# EAGLE board ww4-mm (EAGLE 7.2.0), part 1 of 2
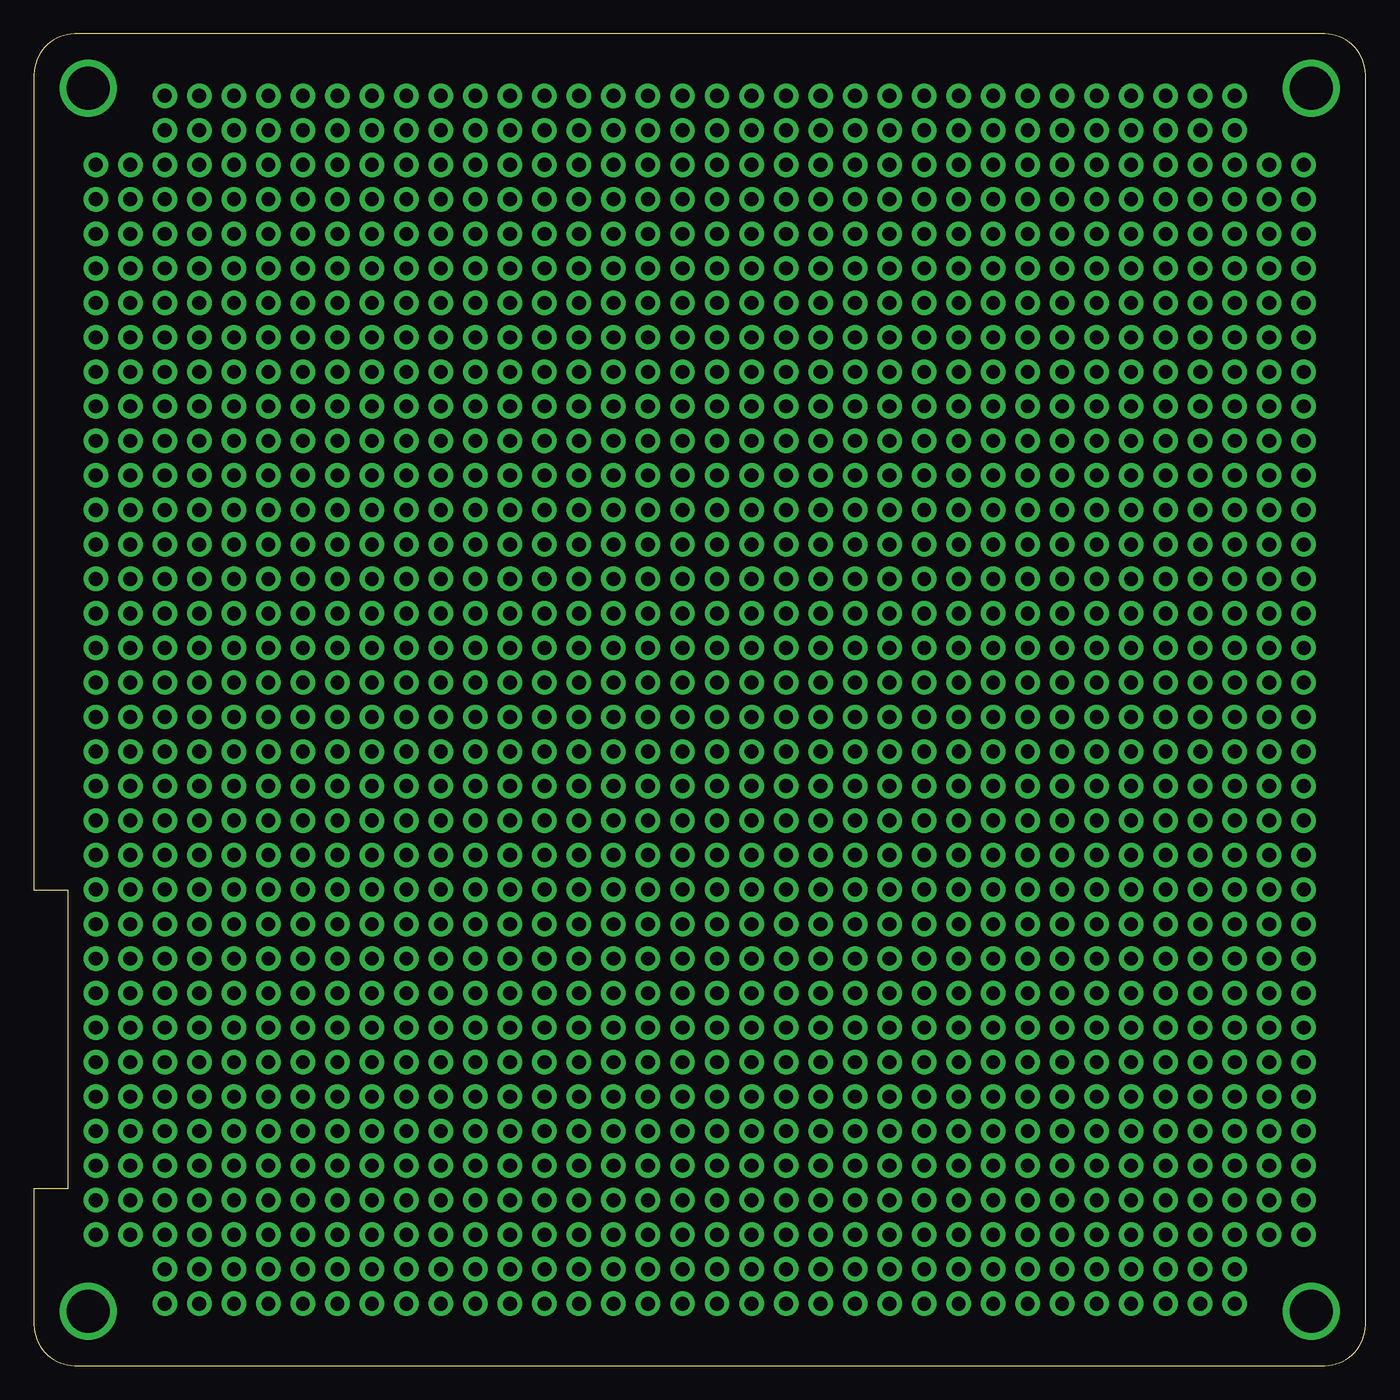
[diagram p0: board, top side]

Size 98 x 98 mm. Coordinates in mm from the lower left corner, seen from the top.
Outline: 0,13 0,3 arc90 3,0 95,0 arc90 98,3 98,95 arc90 95,98 3,98 arc90 0,95 0,35 2.5,35 2.5,13 0,13
Copper layers (1*16): Top 0.035mm / dielectric 1.5mm / Bottom 0.035mm
Design rules "default": minimum track width 10mil, minimum drill 24mil, track to track 8mil, track to pad 8mil, pad to pad 8mil, via to via 8mil, smd to smd 8mil, copper to edge 20mil, drill to drill 8mil, minimum pad ring 10mil, minimum via ring 8mil, stop-mask expansion 4mil, vias tented up to drill 0mil, thermal gap 10mil

## Placement (x,y rotation side)

## Tracks (layer width: path | path; a pad name or v marks a point on that pad's centre or on a via)
MOUNT0  (via drill 3.17 pad 3.17)
  other vias: 4,4
MOUNT1  (via drill 3.17 pad 3.17)
  other vias: 4,94
MOUNT6  (via drill 3.17 pad 3.17)
  other vias: 94,4
MOUNT7  (via drill 3.17 pad 3.17)
  other vias: 94,94
WW2  (via drill 1.02 pad 1.8)
  other vias: 4.55,9.63
WW3  (via drill 1.02 pad 1.8)
  other vias: 4.55,12.17
WW4  (via drill 1.02 pad 1.8)
  other vias: 4.55,14.71
WW5  (via drill 1.02 pad 1.8)
  other vias: 4.55,17.25
WW6  (via drill 1.02 pad 1.8)
  other vias: 4.55,19.79
WW7  (via drill 1.02 pad 1.8)
  other vias: 4.55,22.33
WW8  (via drill 1.02 pad 1.8)
  other vias: 4.55,24.87
WW9  (via drill 1.02 pad 1.8)
  other vias: 4.55,27.41
WW10  (via drill 1.02 pad 1.8)
  other vias: 4.55,29.95
WW11  (via drill 1.02 pad 1.8)
  other vias: 4.55,32.49
WW12  (via drill 1.02 pad 1.8)
  other vias: 4.55,35.03
WW13  (via drill 1.02 pad 1.8)
  other vias: 4.55,37.57
WW14  (via drill 1.02 pad 1.8)
  other vias: 4.55,40.11
WW15  (via drill 1.02 pad 1.8)
  other vias: 4.55,42.65
WW16  (via drill 1.02 pad 1.8)
  other vias: 4.55,45.19
WW17  (via drill 1.02 pad 1.8)
  other vias: 4.55,47.73
WW18  (via drill 1.02 pad 1.8)
  other vias: 4.55,50.27
WW19  (via drill 1.02 pad 1.8)
  other vias: 4.55,52.81
WW20  (via drill 1.02 pad 1.8)
  other vias: 4.55,55.35
WW21  (via drill 1.02 pad 1.8)
  other vias: 4.55,57.89
WW22  (via drill 1.02 pad 1.8)
  other vias: 4.55,60.43
WW23  (via drill 1.02 pad 1.8)
  other vias: 4.55,62.97
WW24  (via drill 1.02 pad 1.8)
  other vias: 4.55,65.51
WW25  (via drill 1.02 pad 1.8)
  other vias: 4.55,68.05
WW26  (via drill 1.02 pad 1.8)
  other vias: 4.55,70.59
WW27  (via drill 1.02 pad 1.8)
  other vias: 4.55,73.13
WW28  (via drill 1.02 pad 1.8)
  other vias: 4.55,75.67
WW29  (via drill 1.02 pad 1.8)
  other vias: 4.55,78.21
WW30  (via drill 1.02 pad 1.8)
  other vias: 4.55,80.75
WW31  (via drill 1.02 pad 1.8)
  other vias: 4.55,83.29
WW32  (via drill 1.02 pad 1.8)
  other vias: 4.55,85.83
WW33  (via drill 1.02 pad 1.8)
  other vias: 4.55,88.37
WW38  (via drill 1.02 pad 1.8)
  other vias: 7.09,9.63
WW39  (via drill 1.02 pad 1.8)
  other vias: 7.09,12.17
WW40  (via drill 1.02 pad 1.8)
  other vias: 7.09,14.71
WW41  (via drill 1.02 pad 1.8)
  other vias: 7.09,17.25
WW42  (via drill 1.02 pad 1.8)
  other vias: 7.09,19.79
WW43  (via drill 1.02 pad 1.8)
  other vias: 7.09,22.33
WW44  (via drill 1.02 pad 1.8)
  other vias: 7.09,24.87
WW45  (via drill 1.02 pad 1.8)
  other vias: 7.09,27.41
WW46  (via drill 1.02 pad 1.8)
  other vias: 7.09,29.95
WW47  (via drill 1.02 pad 1.8)
  other vias: 7.09,32.49
WW48  (via drill 1.02 pad 1.8)
  other vias: 7.09,35.03
WW49  (via drill 1.02 pad 1.8)
  other vias: 7.09,37.57
WW50  (via drill 1.02 pad 1.8)
  other vias: 7.09,40.11
WW51  (via drill 1.02 pad 1.8)
  other vias: 7.09,42.65
WW52  (via drill 1.02 pad 1.8)
  other vias: 7.09,45.19
WW53  (via drill 1.02 pad 1.8)
  other vias: 7.09,47.73
WW54  (via drill 1.02 pad 1.8)
  other vias: 7.09,50.27
WW55  (via drill 1.02 pad 1.8)
  other vias: 7.09,52.81
WW56  (via drill 1.02 pad 1.8)
  other vias: 7.09,55.35
WW57  (via drill 1.02 pad 1.8)
  other vias: 7.09,57.89
WW58  (via drill 1.02 pad 1.8)
  other vias: 7.09,60.43
WW59  (via drill 1.02 pad 1.8)
  other vias: 7.09,62.97
WW60  (via drill 1.02 pad 1.8)
  other vias: 7.09,65.51
WW61  (via drill 1.02 pad 1.8)
  other vias: 7.09,68.05
WW62  (via drill 1.02 pad 1.8)
  other vias: 7.09,70.59
WW63  (via drill 1.02 pad 1.8)
  other vias: 7.09,73.13
WW64  (via drill 1.02 pad 1.8)
  other vias: 7.09,75.67
WW65  (via drill 1.02 pad 1.8)
  other vias: 7.09,78.21
WW66  (via drill 1.02 pad 1.8)
  other vias: 7.09,80.75
WW67  (via drill 1.02 pad 1.8)
  other vias: 7.09,83.29
WW68  (via drill 1.02 pad 1.8)
  other vias: 7.09,85.83
WW69  (via drill 1.02 pad 1.8)
  other vias: 7.09,88.37
WW72  (via drill 1.02 pad 1.8)
  other vias: 9.63,4.55
WW73  (via drill 1.02 pad 1.8)
  other vias: 9.63,7.09
WW74  (via drill 1.02 pad 1.8)
  other vias: 9.63,9.63
WW75  (via drill 1.02 pad 1.8)
  other vias: 9.63,12.17
WW76  (via drill 1.02 pad 1.8)
  other vias: 9.63,14.71
WW77  (via drill 1.02 pad 1.8)
  other vias: 9.63,17.25
WW78  (via drill 1.02 pad 1.8)
  other vias: 9.63,19.79
WW79  (via drill 1.02 pad 1.8)
  other vias: 9.63,22.33
WW80  (via drill 1.02 pad 1.8)
  other vias: 9.63,24.87
WW81  (via drill 1.02 pad 1.8)
  other vias: 9.63,27.41
WW82  (via drill 1.02 pad 1.8)
  other vias: 9.63,29.95
WW83  (via drill 1.02 pad 1.8)
  other vias: 9.63,32.49
WW84  (via drill 1.02 pad 1.8)
  other vias: 9.63,35.03
WW85  (via drill 1.02 pad 1.8)
  other vias: 9.63,37.57
WW86  (via drill 1.02 pad 1.8)
  other vias: 9.63,40.11
WW87  (via drill 1.02 pad 1.8)
  other vias: 9.63,42.65
WW88  (via drill 1.02 pad 1.8)
  other vias: 9.63,45.19
WW89  (via drill 1.02 pad 1.8)
  other vias: 9.63,47.73
WW90  (via drill 1.02 pad 1.8)
  other vias: 9.63,50.27
WW91  (via drill 1.02 pad 1.8)
  other vias: 9.63,52.81
WW92  (via drill 1.02 pad 1.8)
  other vias: 9.63,55.35
WW93  (via drill 1.02 pad 1.8)
  other vias: 9.63,57.89
WW94  (via drill 1.02 pad 1.8)
  other vias: 9.63,60.43
WW95  (via drill 1.02 pad 1.8)
  other vias: 9.63,62.97
WW96  (via drill 1.02 pad 1.8)
  other vias: 9.63,65.51
WW97  (via drill 1.02 pad 1.8)
  other vias: 9.63,68.05
WW98  (via drill 1.02 pad 1.8)
  other vias: 9.63,70.59
WW99  (via drill 1.02 pad 1.8)
  other vias: 9.63,73.13
WW100  (via drill 1.02 pad 1.8)
  other vias: 9.63,75.67
WW101  (via drill 1.02 pad 1.8)
  other vias: 9.63,78.21
WW102  (via drill 1.02 pad 1.8)
  other vias: 9.63,80.75
WW103  (via drill 1.02 pad 1.8)
  other vias: 9.63,83.29
WW104  (via drill 1.02 pad 1.8)
  other vias: 9.63,85.83
WW105  (via drill 1.02 pad 1.8)
  other vias: 9.63,88.37
WW106  (via drill 1.02 pad 1.8)
  other vias: 9.63,90.91
WW107  (via drill 1.02 pad 1.8)
  other vias: 9.63,93.45
WW108  (via drill 1.02 pad 1.8)
  other vias: 12.17,4.55
WW109  (via drill 1.02 pad 1.8)
  other vias: 12.17,7.09
WW110  (via drill 1.02 pad 1.8)
  other vias: 12.17,9.63
WW111  (via drill 1.02 pad 1.8)
  other vias: 12.17,12.17
WW112  (via drill 1.02 pad 1.8)
  other vias: 12.17,14.71
WW113  (via drill 1.02 pad 1.8)
  other vias: 12.17,17.25
WW114  (via drill 1.02 pad 1.8)
  other vias: 12.17,19.79
WW115  (via drill 1.02 pad 1.8)
  other vias: 12.17,22.33
WW116  (via drill 1.02 pad 1.8)
  other vias: 12.17,24.87
WW117  (via drill 1.02 pad 1.8)
  other vias: 12.17,27.41
WW118  (via drill 1.02 pad 1.8)
  other vias: 12.17,29.95
WW119  (via drill 1.02 pad 1.8)
  other vias: 12.17,32.49
WW120  (via drill 1.02 pad 1.8)
  other vias: 12.17,35.03
WW121  (via drill 1.02 pad 1.8)
  other vias: 12.17,37.57
WW122  (via drill 1.02 pad 1.8)
  other vias: 12.17,40.11
WW123  (via drill 1.02 pad 1.8)
  other vias: 12.17,42.65
WW124  (via drill 1.02 pad 1.8)
  other vias: 12.17,45.19
WW125  (via drill 1.02 pad 1.8)
  other vias: 12.17,47.73
WW126  (via drill 1.02 pad 1.8)
  other vias: 12.17,50.27
WW127  (via drill 1.02 pad 1.8)
  other vias: 12.17,52.81
WW128  (via drill 1.02 pad 1.8)
  other vias: 12.17,55.35
WW129  (via drill 1.02 pad 1.8)
  other vias: 12.17,57.89
WW130  (via drill 1.02 pad 1.8)
  other vias: 12.17,60.43
WW131  (via drill 1.02 pad 1.8)
  other vias: 12.17,62.97
WW132  (via drill 1.02 pad 1.8)
  other vias: 12.17,65.51
WW133  (via drill 1.02 pad 1.8)
  other vias: 12.17,68.05
WW134  (via drill 1.02 pad 1.8)
  other vias: 12.17,70.59
WW135  (via drill 1.02 pad 1.8)
  other vias: 12.17,73.13
WW136  (via drill 1.02 pad 1.8)
  other vias: 12.17,75.67
WW137  (via drill 1.02 pad 1.8)
  other vias: 12.17,78.21
WW138  (via drill 1.02 pad 1.8)
  other vias: 12.17,80.75
WW139  (via drill 1.02 pad 1.8)
  other vias: 12.17,83.29
WW140  (via drill 1.02 pad 1.8)
  other vias: 12.17,85.83
WW141  (via drill 1.02 pad 1.8)
  other vias: 12.17,88.37
WW142  (via drill 1.02 pad 1.8)
  other vias: 12.17,90.91
WW143  (via drill 1.02 pad 1.8)
  other vias: 12.17,93.45
WW144  (via drill 1.02 pad 1.8)
  other vias: 14.71,4.55
WW145  (via drill 1.02 pad 1.8)
  other vias: 14.71,7.09
WW146  (via drill 1.02 pad 1.8)
  other vias: 14.71,9.63
WW147  (via drill 1.02 pad 1.8)
  other vias: 14.71,12.17
WW148  (via drill 1.02 pad 1.8)
  other vias: 14.71,14.71
WW149  (via drill 1.02 pad 1.8)
  other vias: 14.71,17.25
WW150  (via drill 1.02 pad 1.8)
  other vias: 14.71,19.79
WW151  (via drill 1.02 pad 1.8)
  other vias: 14.71,22.33
WW152  (via drill 1.02 pad 1.8)
  other vias: 14.71,24.87
WW153  (via drill 1.02 pad 1.8)
  other vias: 14.71,27.41
WW154  (via drill 1.02 pad 1.8)
  other vias: 14.71,29.95
WW155  (via drill 1.02 pad 1.8)
  other vias: 14.71,32.49
WW156  (via drill 1.02 pad 1.8)
  other vias: 14.71,35.03
WW157  (via drill 1.02 pad 1.8)
  other vias: 14.71,37.57
WW158  (via drill 1.02 pad 1.8)
  other vias: 14.71,40.11
WW159  (via drill 1.02 pad 1.8)
  other vias: 14.71,42.65
WW160  (via drill 1.02 pad 1.8)
  other vias: 14.71,45.19
WW161  (via drill 1.02 pad 1.8)
  other vias: 14.71,47.73
WW162  (via drill 1.02 pad 1.8)
  other vias: 14.71,50.27
WW163  (via drill 1.02 pad 1.8)
  other vias: 14.71,52.81
WW164  (via drill 1.02 pad 1.8)
  other vias: 14.71,55.35
WW165  (via drill 1.02 pad 1.8)
  other vias: 14.71,57.89
WW166  (via drill 1.02 pad 1.8)
  other vias: 14.71,60.43
WW167  (via drill 1.02 pad 1.8)
  other vias: 14.71,62.97
WW168  (via drill 1.02 pad 1.8)
  other vias: 14.71,65.51
WW169  (via drill 1.02 pad 1.8)
  other vias: 14.71,68.05
WW170  (via drill 1.02 pad 1.8)
  other vias: 14.71,70.59
WW171  (via drill 1.02 pad 1.8)
  other vias: 14.71,73.13
WW172  (via drill 1.02 pad 1.8)
  other vias: 14.71,75.67
WW173  (via drill 1.02 pad 1.8)
  other vias: 14.71,78.21
WW174  (via drill 1.02 pad 1.8)
  other vias: 14.71,80.75
WW175  (via drill 1.02 pad 1.8)
  other vias: 14.71,83.29
WW176  (via drill 1.02 pad 1.8)
  other vias: 14.71,85.83
WW177  (via drill 1.02 pad 1.8)
  other vias: 14.71,88.37
WW178  (via drill 1.02 pad 1.8)
  other vias: 14.71,90.91
WW179  (via drill 1.02 pad 1.8)
  other vias: 14.71,93.45
WW180  (via drill 1.02 pad 1.8)
  other vias: 17.25,4.55
WW181  (via drill 1.02 pad 1.8)
  other vias: 17.25,7.09
WW182  (via drill 1.02 pad 1.8)
  other vias: 17.25,9.63
WW183  (via drill 1.02 pad 1.8)
  other vias: 17.25,12.17
WW184  (via drill 1.02 pad 1.8)
  other vias: 17.25,14.71
WW185  (via drill 1.02 pad 1.8)
  other vias: 17.25,17.25
WW186  (via drill 1.02 pad 1.8)
  other vias: 17.25,19.79
WW187  (via drill 1.02 pad 1.8)
  other vias: 17.25,22.33
WW188  (via drill 1.02 pad 1.8)
  other vias: 17.25,24.87
WW189  (via drill 1.02 pad 1.8)
  other vias: 17.25,27.41
WW190  (via drill 1.02 pad 1.8)
  other vias: 17.25,29.95
WW191  (via drill 1.02 pad 1.8)
  other vias: 17.25,32.49
WW192  (via drill 1.02 pad 1.8)
  other vias: 17.25,35.03
WW193  (via drill 1.02 pad 1.8)
  other vias: 17.25,37.57
WW194  (via drill 1.02 pad 1.8)
  other vias: 17.25,40.11
WW195  (via drill 1.02 pad 1.8)
  other vias: 17.25,42.65
WW196  (via drill 1.02 pad 1.8)
  other vias: 17.25,45.19
WW197  (via drill 1.02 pad 1.8)
  other vias: 17.25,47.73
WW198  (via drill 1.02 pad 1.8)
  other vias: 17.25,50.27
WW199  (via drill 1.02 pad 1.8)
  other vias: 17.25,52.81
WW200  (via drill 1.02 pad 1.8)
  other vias: 17.25,55.35
WW201  (via drill 1.02 pad 1.8)
  other vias: 17.25,57.89
WW202  (via drill 1.02 pad 1.8)
  other vias: 17.25,60.43
WW203  (via drill 1.02 pad 1.8)
  other vias: 17.25,62.97
WW204  (via drill 1.02 pad 1.8)
  other vias: 17.25,65.51
WW205  (via drill 1.02 pad 1.8)
  other vias: 17.25,68.05
WW206  (via drill 1.02 pad 1.8)
  other vias: 17.25,70.59
WW207  (via drill 1.02 pad 1.8)
  other vias: 17.25,73.13
WW208  (via drill 1.02 pad 1.8)
  other vias: 17.25,75.67
WW209  (via drill 1.02 pad 1.8)
  other vias: 17.25,78.21
WW210  (via drill 1.02 pad 1.8)
  other vias: 17.25,80.75
WW211  (via drill 1.02 pad 1.8)
  other vias: 17.25,83.29
WW212  (via drill 1.02 pad 1.8)
  other vias: 17.25,85.83
WW213  (via drill 1.02 pad 1.8)
  other vias: 17.25,88.37
WW214  (via drill 1.02 pad 1.8)
  other vias: 17.25,90.91
WW215  (via drill 1.02 pad 1.8)
  other vias: 17.25,93.45
WW216  (via drill 1.02 pad 1.8)
  other vias: 19.79,4.55
WW217  (via drill 1.02 pad 1.8)
  other vias: 19.79,7.09
WW218  (via drill 1.02 pad 1.8)
  other vias: 19.79,9.63
WW219  (via drill 1.02 pad 1.8)
  other vias: 19.79,12.17
WW220  (via drill 1.02 pad 1.8)
  other vias: 19.79,14.71
WW221  (via drill 1.02 pad 1.8)
  other vias: 19.79,17.25
WW222  (via drill 1.02 pad 1.8)
  other vias: 19.79,19.79
WW223  (via drill 1.02 pad 1.8)
  other vias: 19.79,22.33
WW224  (via drill 1.02 pad 1.8)
  other vias: 19.79,24.87
WW225  (via drill 1.02 pad 1.8)
  other vias: 19.79,27.41
WW226  (via drill 1.02 pad 1.8)
  other vias: 19.79,29.95
WW227  (via drill 1.02 pad 1.8)
  other vias: 19.79,32.49
WW228  (via drill 1.02 pad 1.8)
  other vias: 19.79,35.03
WW229  (via drill 1.02 pad 1.8)
  other vias: 19.79,37.57
WW230  (via drill 1.02 pad 1.8)
  other vias: 19.79,40.11
WW231  (via drill 1.02 pad 1.8)
  other vias: 19.79,42.65
WW232  (via drill 1.02 pad 1.8)
  other vias: 19.79,45.19
WW233  (via drill 1.02 pad 1.8)
  other vias: 19.79,47.73
WW234  (via drill 1.02 pad 1.8)
  other vias: 19.79,50.27
WW235  (via drill 1.02 pad 1.8)
  other vias: 19.79,52.81
WW236  (via drill 1.02 pad 1.8)
  other vias: 19.79,55.35
WW237  (via drill 1.02 pad 1.8)
  other vias: 19.79,57.89
WW238  (via drill 1.02 pad 1.8)
  other vias: 19.79,60.43
WW239  (via drill 1.02 pad 1.8)
  other vias: 19.79,62.97
WW240  (via drill 1.02 pad 1.8)
  other vias: 19.79,65.51
WW241  (via drill 1.02 pad 1.8)
  other vias: 19.79,68.05
WW242  (via drill 1.02 pad 1.8)
  other vias: 19.79,70.59
WW243  (via drill 1.02 pad 1.8)
  other vias: 19.79,73.13
WW244  (via drill 1.02 pad 1.8)
  other vias: 19.79,75.67
WW245  (via drill 1.02 pad 1.8)
  other vias: 19.79,78.21
WW246  (via drill 1.02 pad 1.8)
  other vias: 19.79,80.75
WW247  (via drill 1.02 pad 1.8)
  other vias: 19.79,83.29
WW248  (via drill 1.02 pad 1.8)
  other vias: 19.79,85.83
WW249  (via drill 1.02 pad 1.8)
  other vias: 19.79,88.37
WW250  (via drill 1.02 pad 1.8)
  other vias: 19.79,90.91
WW251  (via drill 1.02 pad 1.8)
  other vias: 19.79,93.45
WW252  (via drill 1.02 pad 1.8)
  other vias: 22.33,4.55
WW253  (via drill 1.02 pad 1.8)
  other vias: 22.33,7.09
WW254  (via drill 1.02 pad 1.8)
  other vias: 22.33,9.63
WW255  (via drill 1.02 pad 1.8)
  other vias: 22.33,12.17
WW256  (via drill 1.02 pad 1.8)
  other vias: 22.33,14.71
WW257  (via drill 1.02 pad 1.8)
  other vias: 22.33,17.25
WW258  (via drill 1.02 pad 1.8)
  other vias: 22.33,19.79
WW259  (via drill 1.02 pad 1.8)
  other vias: 22.33,22.33
WW260  (via drill 1.02 pad 1.8)
  other vias: 22.33,24.87
WW261  (via drill 1.02 pad 1.8)
  other vias: 22.33,27.41
WW262  (via drill 1.02 pad 1.8)
  other vias: 22.33,29.95
WW263  (via drill 1.02 pad 1.8)
  other vias: 22.33,32.49
WW264  (via drill 1.02 pad 1.8)
  other vias: 22.33,35.03
WW265  (via drill 1.02 pad 1.8)
  other vias: 22.33,37.57
WW266  (via drill 1.02 pad 1.8)
  other vias: 22.33,40.11
WW267  (via drill 1.02 pad 1.8)
  other vias: 22.33,42.65
WW268  (via drill 1.02 pad 1.8)
  other vias: 22.33,45.19
WW269  (via drill 1.02 pad 1.8)
  other vias: 22.33,47.73
WW270  (via drill 1.02 pad 1.8)
  other vias: 22.33,50.27
WW271  (via drill 1.02 pad 1.8)
  other vias: 22.33,52.81
WW272  (via drill 1.02 pad 1.8)
  other vias: 22.33,55.35
WW273  (via drill 1.02 pad 1.8)
  other vias: 22.33,57.89
WW274  (via drill 1.02 pad 1.8)
  other vias: 22.33,60.43
WW275  (via drill 1.02 pad 1.8)
  other vias: 22.33,62.97
WW276  (via drill 1.02 pad 1.8)
  other vias: 22.33,65.51
WW277  (via drill 1.02 pad 1.8)
  other vias: 22.33,68.05
WW278  (via drill 1.02 pad 1.8)
  other vias: 22.33,70.59
WW279  (via drill 1.02 pad 1.8)
  other vias: 22.33,73.13
WW280  (via drill 1.02 pad 1.8)
  other vias: 22.33,75.67
WW281  (via drill 1.02 pad 1.8)
  other vias: 22.33,78.21
WW282  (via drill 1.02 pad 1.8)
  other vias: 22.33,80.75
WW283  (via drill 1.02 pad 1.8)
  other vias: 22.33,83.29
WW284  (via drill 1.02 pad 1.8)
  other vias: 22.33,85.83
WW285  (via drill 1.02 pad 1.8)
  other vias: 22.33,88.37
WW286  (via drill 1.02 pad 1.8)
  other vias: 22.33,90.91
WW287  (via drill 1.02 pad 1.8)
  other vias: 22.33,93.45
WW288  (via drill 1.02 pad 1.8)
  other vias: 24.87,4.55
WW289  (via drill 1.02 pad 1.8)
  other vias: 24.87,7.09
WW290  (via drill 1.02 pad 1.8)
  other vias: 24.87,9.63
WW291  (via drill 1.02 pad 1.8)
  other vias: 24.87,12.17
WW292  (via drill 1.02 pad 1.8)
  other vias: 24.87,14.71
WW293  (via drill 1.02 pad 1.8)
  other vias: 24.87,17.25
WW294  (via drill 1.02 pad 1.8)
  other vias: 24.87,19.79
WW295  (via drill 1.02 pad 1.8)
  other vias: 24.87,22.33
WW296  (via drill 1.02 pad 1.8)
  other vias: 24.87,24.87
WW297  (via drill 1.02 pad 1.8)
  other vias: 24.87,27.41
WW298  (via drill 1.02 pad 1.8)
  other vias: 24.87,29.95
WW299  (via drill 1.02 pad 1.8)
  other vias: 24.87,32.49
WW300  (via drill 1.02 pad 1.8)
  other vias: 24.87,35.03
WW301  (via drill 1.02 pad 1.8)
  other vias: 24.87,37.57
WW302  (via drill 1.02 pad 1.8)
  other vias: 24.87,40.11
WW303  (via drill 1.02 pad 1.8)
  other vias: 24.87,42.65
WW304  (via drill 1.02 pad 1.8)
  other vias: 24.87,45.19
WW305  (via drill 1.02 pad 1.8)
  other vias: 24.87,47.73
WW306  (via drill 1.02 pad 1.8)
  other vias: 24.87,50.27
WW307  (via drill 1.02 pad 1.8)
  other vias: 24.87,52.81
WW308  (via drill 1.02 pad 1.8)
  other vias: 24.87,55.35
WW309  (via drill 1.02 pad 1.8)
  other vias: 24.87,57.89
WW310  (via drill 1.02 pad 1.8)
  other vias: 24.87,60.43
WW311  (via drill 1.02 pad 1.8)
  other vias: 24.87,62.97
WW312  (via drill 1.02 pad 1.8)
  other vias: 24.87,65.51
WW313  (via drill 1.02 pad 1.8)
  other vias: 24.87,68.05
WW314  (via drill 1.02 pad 1.8)
  other vias: 24.87,70.59
WW315  (via drill 1.02 pad 1.8)
  other vias: 24.87,73.13
WW316  (via drill 1.02 pad 1.8)
  other vias: 24.87,75.67
WW317  (via drill 1.02 pad 1.8)
  other vias: 24.87,78.21
WW318  (via drill 1.02 pad 1.8)
  other vias: 24.87,80.75
WW319  (via drill 1.02 pad 1.8)
  other vias: 24.87,83.29
WW320  (via drill 1.02 pad 1.8)
  other vias: 24.87,85.83
WW321  (via drill 1.02 pad 1.8)
  other vias: 24.87,88.37
WW322  (via drill 1.02 pad 1.8)
  other vias: 24.87,90.91
WW323  (via drill 1.02 pad 1.8)
  other vias: 24.87,93.45
WW324  (via drill 1.02 pad 1.8)
  other vias: 27.41,4.55
WW325  (via drill 1.02 pad 1.8)
  other vias: 27.41,7.09
WW326  (via drill 1.02 pad 1.8)
  other vias: 27.41,9.63
WW327  (via drill 1.02 pad 1.8)
  other vias: 27.41,12.17
WW328  (via drill 1.02 pad 1.8)
  other vias: 27.41,14.71
WW329  (via drill 1.02 pad 1.8)
  other vias: 27.41,17.25
WW330  (via drill 1.02 pad 1.8)
  other vias: 27.41,19.79
WW331  (via drill 1.02 pad 1.8)
  other vias: 27.41,22.33
WW332  (via drill 1.02 pad 1.8)
  other vias: 27.41,24.87
WW333  (via drill 1.02 pad 1.8)
  other vias: 27.41,27.41
WW334  (via drill 1.02 pad 1.8)
  other vias: 27.41,29.95
WW335  (via drill 1.02 pad 1.8)
  other vias: 27.41,32.49
WW336  (via drill 1.02 pad 1.8)
  other vias: 27.41,35.03
WW337  (via drill 1.02 pad 1.8)
  other vias: 27.41,37.57
WW338  (via drill 1.02 pad 1.8)
  other vias: 27.41,40.11
WW339  (via drill 1.02 pad 1.8)
  other vias: 27.41,42.65
WW340  (via drill 1.02 pad 1.8)
  other vias: 27.41,45.19
WW341  (via drill 1.02 pad 1.8)
  other vias: 27.41,47.73
WW342  (via drill 1.02 pad 1.8)
  other vias: 27.41,50.27
WW343  (via drill 1.02 pad 1.8)
  other vias: 27.41,52.81
WW344  (via drill 1.02 pad 1.8)
  other vias: 27.41,55.35
WW345  (via drill 1.02 pad 1.8)
  other vias: 27.41,57.89
WW346  (via drill 1.02 pad 1.8)
  other vias: 27.41,60.43
WW347  (via drill 1.02 pad 1.8)
  other vias: 27.41,62.97
WW348  (via drill 1.02 pad 1.8)
  other vias: 27.41,65.51
WW349  (via drill 1.02 pad 1.8)
  other vias: 27.41,68.05
WW350  (via drill 1.02 pad 1.8)
  other vias: 27.41,70.59
WW351  (via drill 1.02 pad 1.8)
  other vias: 27.41,73.13
WW352  (via drill 1.02 pad 1.8)
  other vias: 27.41,75.67
WW353  (via drill 1.02 pad 1.8)
  other vias: 27.41,78.21
WW354  (via drill 1.02 pad 1.8)
  other vias: 27.41,80.75
WW355  (via drill 1.02 pad 1.8)
  other vias: 27.41,83.29
WW356  (via drill 1.02 pad 1.8)
  other vias: 27.41,85.83
WW357  (via drill 1.02 pad 1.8)
  other vias: 27.41,88.37
WW358  (via drill 1.02 pad 1.8)
  other vias: 27.41,90.91
WW359  (via drill 1.02 pad 1.8)
  other vias: 27.41,93.45
WW360  (via drill 1.02 pad 1.8)
  other vias: 29.95,4.55
WW361  (via drill 1.02 pad 1.8)
  other vias: 29.95,7.09
WW362  (via drill 1.02 pad 1.8)
  other vias: 29.95,9.63
WW363  (via drill 1.02 pad 1.8)
  other vias: 29.95,12.17
WW364  (via drill 1.02 pad 1.8)
  other vias: 29.95,14.71
WW365  (via drill 1.02 pad 1.8)
  other vias: 29.95,17.25
WW366  (via drill 1.02 pad 1.8)
  other vias: 29.95,19.79
WW367  (via drill 1.02 pad 1.8)
  other vias: 29.95,22.33
WW368  (via drill 1.02 pad 1.8)
  other vias: 29.95,24.87
WW369  (via drill 1.02 pad 1.8)
  other vias: 29.95,27.41
WW370  (via drill 1.02 pad 1.8)
  other vias: 29.95,29.95
WW371  (via drill 1.02 pad 1.8)
  other vias: 29.95,32.49
WW372  (via drill 1.02 pad 1.8)
  other vias: 29.95,35.03
WW373  (via drill 1.02 pad 1.8)
  other vias: 29.95,37.57
WW374  (via drill 1.02 pad 1.8)
  other vias: 29.95,40.11
WW375  (via drill 1.02 pad 1.8)
  other vias: 29.95,42.65
WW376  (via drill 1.02 pad 1.8)
  other vias: 29.95,45.19
WW377  (via drill 1.02 pad 1.8)
  other vias: 29.95,47.73
WW378  (via drill 1.02 pad 1.8)
  other vias: 29.95,50.27
WW379  (via drill 1.02 pad 1.8)
  other vias: 29.95,52.81
WW380  (via drill 1.02 pad 1.8)
  other vias: 29.95,55.35
WW381  (via drill 1.02 pad 1.8)
  other vias: 29.95,57.89
WW382  (via drill 1.02 pad 1.8)
  other vias: 29.95,60.43
WW383  (via drill 1.02 pad 1.8)
  other vias: 29.95,62.97
WW384  (via drill 1.02 pad 1.8)
  other vias: 29.95,65.51
WW385  (via drill 1.02 pad 1.8)
  other vias: 29.95,68.05
WW386  (via drill 1.02 pad 1.8)
  other vias: 29.95,70.59
WW387  (via drill 1.02 pad 1.8)
  other vias: 29.95,73.13
WW388  (via drill 1.02 pad 1.8)
  other vias: 29.95,75.67
WW389  (via drill 1.02 pad 1.8)
  other vias: 29.95,78.21
WW390  (via drill 1.02 pad 1.8)
  other vias: 29.95,80.75
WW391  (via drill 1.02 pad 1.8)
  other vias: 29.95,83.29
WW392  (via drill 1.02 pad 1.8)
  other vias: 29.95,85.83
WW393  (via drill 1.02 pad 1.8)
  other vias: 29.95,88.37
WW394  (via drill 1.02 pad 1.8)
  other vias: 29.95,90.91
WW395  (via drill 1.02 pad 1.8)
  other vias: 29.95,93.45
WW396  (via drill 1.02 pad 1.8)
  other vias: 32.49,4.55
WW397  (via drill 1.02 pad 1.8)
  other vias: 32.49,7.09
WW398  (via drill 1.02 pad 1.8)
  other vias: 32.49,9.63
WW399  (via drill 1.02 pad 1.8)
  other vias: 32.49,12.17
WW400  (via drill 1.02 pad 1.8)
  other vias: 32.49,14.71
WW401  (via drill 1.02 pad 1.8)
  other vias: 32.49,17.25
WW402  (via drill 1.02 pad 1.8)
  other vias: 32.49,19.79
WW403  (via drill 1.02 pad 1.8)
  other vias: 32.49,22.33
WW404  (via drill 1.02 pad 1.8)
  other vias: 32.49,24.87
WW405  (via drill 1.02 pad 1.8)
  other vias: 32.49,27.41
WW406  (via drill 1.02 pad 1.8)
  other vias: 32.49,29.95
WW407  (via drill 1.02 pad 1.8)
  other vias: 32.49,32.49
WW408  (via drill 1.02 pad 1.8)
  other vias: 32.49,35.03
WW409  (via drill 1.02 pad 1.8)
  other vias: 32.49,37.57
WW410  (via drill 1.02 pad 1.8)
  other vias: 32.49,40.11
WW411  (via drill 1.02 pad 1.8)
  other vias: 32.49,42.65
WW412  (via drill 1.02 pad 1.8)
  other vias: 32.49,45.19
WW413  (via drill 1.02 pad 1.8)
  other vias: 32.49,47.73
WW414  (via drill 1.02 pad 1.8)
  other vias: 32.49,50.27
WW415  (via drill 1.02 pad 1.8)
  other vias: 32.49,52.81
WW416  (via drill 1.02 pad 1.8)
  other vias: 32.49,55.35
WW417  (via drill 1.02 pad 1.8)
  other vias: 32.49,57.89
WW418  (via drill 1.02 pad 1.8)
  other vias: 32.49,60.43
WW419  (via drill 1.02 pad 1.8)
  other vias: 32.49,62.97
WW420  (via drill 1.02 pad 1.8)
  other vias: 32.49,65.51
WW421  (via drill 1.02 pad 1.8)
  other vias: 32.49,68.05
WW422  (via drill 1.02 pad 1.8)
  other vias: 32.49,70.59
WW423  (via drill 1.02 pad 1.8)
  other vias: 32.49,73.13
WW424  (via drill 1.02 pad 1.8)
  other vias: 32.49,75.67
WW425  (via drill 1.02 pad 1.8)
  other vias: 32.49,78.21
WW426  (via drill 1.02 pad 1.8)
  other vias: 32.49,80.75
WW427  (via drill 1.02 pad 1.8)
  other vias: 32.49,83.29
WW428  (via drill 1.02 pad 1.8)
  other vias: 32.49,85.83
WW429  (via drill 1.02 pad 1.8)
  other vias: 32.49,88.37
WW430  (via drill 1.02 pad 1.8)
  other vias: 32.49,90.91
WW431  (via drill 1.02 pad 1.8)
  other vias: 32.49,93.45
WW432  (via drill 1.02 pad 1.8)
  other vias: 35.03,4.55
WW433  (via drill 1.02 pad 1.8)
  other vias: 35.03,7.09
WW434  (via drill 1.02 pad 1.8)
  other vias: 35.03,9.63
WW435  (via drill 1.02 pad 1.8)
  other vias: 35.03,12.17
WW436  (via drill 1.02 pad 1.8)
  other vias: 35.03,14.71
WW437  (via drill 1.02 pad 1.8)
  other vias: 35.03,17.25
WW438  (via drill 1.02 pad 1.8)
  other vias: 35.03,19.79
WW439  (via drill 1.02 pad 1.8)
  other vias: 35.03,22.33
WW440  (via drill 1.02 pad 1.8)
  other vias: 35.03,24.87
WW441  (via drill 1.02 pad 1.8)
  other vias: 35.03,27.41
WW442  (via drill 1.02 pad 1.8)
  other vias: 35.03,29.95
WW443  (via drill 1.02 pad 1.8)
  other vias: 35.03,32.49
WW444  (via drill 1.02 pad 1.8)
  other vias: 35.03,35.03
WW445  (via drill 1.02 pad 1.8)
  other vias: 35.03,37.57
WW446  (via drill 1.02 pad 1.8)
  other vias: 35.03,40.11
WW447  (via drill 1.02 pad 1.8)
  other vias: 35.03,42.65
WW448  (via drill 1.02 pad 1.8)
  other vias: 35.03,45.19
WW449  (via drill 1.02 pad 1.8)
  other vias: 35.03,47.73
WW450  (via drill 1.02 pad 1.8)
  other vias: 35.03,50.27
WW451  (via drill 1.02 pad 1.8)
  other vias: 35.03,52.81
WW452  (via drill 1.02 pad 1.8)
  other vias: 35.03,55.35
WW453  (via drill 1.02 pad 1.8)
  other vias: 35.03,57.89
WW454  (via drill 1.02 pad 1.8)
  other vias: 35.03,60.43
WW455  (via drill 1.02 pad 1.8)
  other vias: 35.03,62.97
WW456  (via drill 1.02 pad 1.8)
  other vias: 35.03,65.51
WW457  (via drill 1.02 pad 1.8)
  other vias: 35.03,68.05
WW458  (via drill 1.02 pad 1.8)
  other vias: 35.03,70.59
WW459  (via drill 1.02 pad 1.8)
  other vias: 35.03,73.13
WW460  (via drill 1.02 pad 1.8)
  other vias: 35.03,75.67
WW461  (via drill 1.02 pad 1.8)
  other vias: 35.03,78.21
WW462  (via drill 1.02 pad 1.8)
  other vias: 35.03,80.75
WW463  (via drill 1.02 pad 1.8)
  other vias: 35.03,83.29
WW464  (via drill 1.02 pad 1.8)
  other vias: 35.03,85.83
WW465  (via drill 1.02 pad 1.8)
  other vias: 35.03,88.37
WW466  (via drill 1.02 pad 1.8)
  other vias: 35.03,90.91
WW467  (via drill 1.02 pad 1.8)
  other vias: 35.03,93.45
WW468  (via drill 1.02 pad 1.8)
  other vias: 37.57,4.55
WW469  (via drill 1.02 pad 1.8)
  other vias: 37.57,7.09
WW470  (via drill 1.02 pad 1.8)
  other vias: 37.57,9.63
WW471  (via drill 1.02 pad 1.8)
  other vias: 37.57,12.17
WW472  (via drill 1.02 pad 1.8)
  other vias: 37.57,14.71
WW473  (via drill 1.02 pad 1.8)
  other vias: 37.57,17.25
WW474  (via drill 1.02 pad 1.8)
  other vias: 37.57,19.79
WW475  (via drill 1.02 pad 1.8)
  other vias: 37.57,22.33
WW476  (via drill 1.02 pad 1.8)
  other vias: 37.57,24.87
WW477  (via drill 1.02 pad 1.8)
  other vias: 37.57,27.41
WW478  (via drill 1.02 pad 1.8)
  other vias: 37.57,29.95
WW479  (via drill 1.02 pad 1.8)
  other vias: 37.57,32.49
WW480  (via drill 1.02 pad 1.8)
  other vias: 37.57,35.03
WW481  (via drill 1.02 pad 1.8)
  other vias: 37.57,37.57
WW482  (via drill 1.02 pad 1.8)
  other vias: 37.57,40.11
WW483  (via drill 1.02 pad 1.8)
  other vias: 37.57,42.65
WW484  (via drill 1.02 pad 1.8)
  other vias: 37.57,45.19
WW485  (via drill 1.02 pad 1.8)
  other vias: 37.57,47.73
WW486  (via drill 1.02 pad 1.8)
  other vias: 37.57,50.27
WW487  (via drill 1.02 pad 1.8)
  other vias: 37.57,52.81
WW488  (via drill 1.02 pad 1.8)
  other vias: 37.57,55.35
WW489  (via drill 1.02 pad 1.8)
  other vias: 37.57,57.89
WW490  (via drill 1.02 pad 1.8)
  other vias: 37.57,60.43
WW491  (via drill 1.02 pad 1.8)
  other vias: 37.57,62.97
WW492  (via drill 1.02 pad 1.8)
  other vias: 37.57,65.51
WW493  (via drill 1.02 pad 1.8)
  other vias: 37.57,68.05
WW494  (via drill 1.02 pad 1.8)
  other vias: 37.57,70.59
WW495  (via drill 1.02 pad 1.8)
  other vias: 37.57,73.13
WW496  (via drill 1.02 pad 1.8)
  other vias: 37.57,75.67
WW497  (via drill 1.02 pad 1.8)
  other vias: 37.57,78.21
WW498  (via drill 1.02 pad 1.8)
  other vias: 37.57,80.75
WW499  (via drill 1.02 pad 1.8)
  other vias: 37.57,83.29
WW500  (via drill 1.02 pad 1.8)
  other vias: 37.57,85.83
WW501  (via drill 1.02 pad 1.8)
  other vias: 37.57,88.37
WW502  (via drill 1.02 pad 1.8)
  other vias: 37.57,90.91
WW503  (via drill 1.02 pad 1.8)
  other vias: 37.57,93.45
WW504  (via drill 1.02 pad 1.8)
  other vias: 40.11,4.55
WW505  (via drill 1.02 pad 1.8)
  other vias: 40.11,7.09
WW506  (via drill 1.02 pad 1.8)
  other vias: 40.11,9.63
WW507  (via drill 1.02 pad 1.8)
  other vias: 40.11,12.17
WW508  (via drill 1.02 pad 1.8)
  other vias: 40.11,14.71
WW509  (via drill 1.02 pad 1.8)
  other vias: 40.11,17.25
WW510  (via drill 1.02 pad 1.8)
  other vias: 40.11,19.79
WW511  (via drill 1.02 pad 1.8)
  other vias: 40.11,22.33
WW512  (via drill 1.02 pad 1.8)
  other vias: 40.11,24.87
WW513  (via drill 1.02 pad 1.8)
  other vias: 40.11,27.41
WW514  (via drill 1.02 pad 1.8)
  other vias: 40.11,29.95
WW515  (via drill 1.02 pad 1.8)
  other vias: 40.11,32.49
WW516  (via drill 1.02 pad 1.8)
  other vias: 40.11,35.03
WW517  (via drill 1.02 pad 1.8)
  other vias: 40.11,37.57
WW518  (via drill 1.02 pad 1.8)
  other vias: 40.11,40.11
WW519  (via drill 1.02 pad 1.8)
  other vias: 40.11,42.65
WW520  (via drill 1.02 pad 1.8)
  other vias: 40.11,45.19
WW521  (via drill 1.02 pad 1.8)
  other vias: 40.11,47.73
WW522  (via drill 1.02 pad 1.8)
  other vias: 40.11,50.27
WW523  (via drill 1.02 pad 1.8)
  other vias: 40.11,52.81
WW524  (via drill 1.02 pad 1.8)
  other vias: 40.11,55.35
WW525  (via drill 1.02 pad 1.8)
  other vias: 40.11,57.89
WW526  (via drill 1.02 pad 1.8)
  other vias: 40.11,60.43
WW527  (via drill 1.02 pad 1.8)
  other vias: 40.11,62.97
WW528  (via drill 1.02 pad 1.8)
  other vias: 40.11,65.51
WW529  (via drill 1.02 pad 1.8)
  other vias: 40.11,68.05
WW530  (via drill 1.02 pad 1.8)
  other vias: 40.11,70.59
WW531  (via drill 1.02 pad 1.8)
  other vias: 40.11,73.13
WW532  (via drill 1.02 pad 1.8)
  other vias: 40.11,75.67
WW533  (via drill 1.02 pad 1.8)
  other vias: 40.11,78.21
WW534  (via drill 1.02 pad 1.8)
  other vias: 40.11,80.75
WW535  (via drill 1.02 pad 1.8)
  other vias: 40.11,83.29
WW536  (via drill 1.02 pad 1.8)
  other vias: 40.11,85.83
WW537  (via drill 1.02 pad 1.8)
  other vias: 40.11,88.37
WW538  (via drill 1.02 pad 1.8)
  other vias: 40.11,90.91
WW539  (via drill 1.02 pad 1.8)
  other vias: 40.11,93.45
WW540  (via drill 1.02 pad 1.8)
  other vias: 42.65,4.55
WW541  (via drill 1.02 pad 1.8)
  other vias: 42.65,7.09
WW542  (via drill 1.02 pad 1.8)
  other vias: 42.65,9.63
WW543  (via drill 1.02 pad 1.8)
  other vias: 42.65,12.17
WW544  (via drill 1.02 pad 1.8)
  other vias: 42.65,14.71
WW545  (via drill 1.02 pad 1.8)
  other vias: 42.65,17.25
WW546  (via drill 1.02 pad 1.8)
  other vias: 42.65,19.79
WW547  (via drill 1.02 pad 1.8)
  other vias: 42.65,22.33
WW548  (via drill 1.02 pad 1.8)
  other vias: 42.65,24.87
WW549  (via drill 1.02 pad 1.8)
  other vias: 42.65,27.41
WW550  (via drill 1.02 pad 1.8)
  other vias: 42.65,29.95
WW551  (via drill 1.02 pad 1.8)
  other vias: 42.65,32.49
WW552  (via drill 1.02 pad 1.8)
  other vias: 42.65,35.03
WW553  (via drill 1.02 pad 1.8)
  other vias: 42.65,37.57
WW554  (via drill 1.02 pad 1.8)
  other vias: 42.65,40.11
WW555  (via drill 1.02 pad 1.8)
  other vias: 42.65,42.65
WW556  (via drill 1.02 pad 1.8)
  other vias: 42.65,45.19
WW557  (via drill 1.02 pad 1.8)
  other vias: 42.65,47.73
WW558  (via drill 1.02 pad 1.8)
  other vias: 42.65,50.27
WW559  (via drill 1.02 pad 1.8)
  other vias: 42.65,52.81
WW560  (via drill 1.02 pad 1.8)
  other vias: 42.65,55.35
WW561  (via drill 1.02 pad 1.8)
  other vias: 42.65,57.89
WW562  (via drill 1.02 pad 1.8)
  other vias: 42.65,60.43
WW563  (via drill 1.02 pad 1.8)
  other vias: 42.65,62.97
WW564  (via drill 1.02 pad 1.8)
  other vias: 42.65,65.51
WW565  (via drill 1.02 pad 1.8)
  other vias: 42.65,68.05
WW566  (via drill 1.02 pad 1.8)
  other vias: 42.65,70.59
WW567  (via drill 1.02 pad 1.8)
  other vias: 42.65,73.13
WW568  (via drill 1.02 pad 1.8)
  other vias: 42.65,75.67
WW569  (via drill 1.02 pad 1.8)
  other vias: 42.65,78.21
WW570  (via drill 1.02 pad 1.8)
  other vias: 42.65,80.75
WW571  (via drill 1.02 pad 1.8)
  other vias: 42.65,83.29
WW572  (via drill 1.02 pad 1.8)
  other vias: 42.65,85.83
WW573  (via drill 1.02 pad 1.8)
  other vias: 42.65,88.37
WW574  (via drill 1.02 pad 1.8)
  other vias: 42.65,90.91
WW575  (via drill 1.02 pad 1.8)
  other vias: 42.65,93.45
WW576  (via drill 1.02 pad 1.8)
  other vias: 45.19,4.55
WW577  (via drill 1.02 pad 1.8)
  other vias: 45.19,7.09
WW578  (via drill 1.02 pad 1.8)
  other vias: 45.19,9.63
WW579  (via drill 1.02 pad 1.8)
  other vias: 45.19,12.17
WW580  (via drill 1.02 pad 1.8)
  other vias: 45.19,14.71
WW581  (via drill 1.02 pad 1.8)
  other vias: 45.19,17.25
WW582  (via drill 1.02 pad 1.8)
  other vias: 45.19,19.79
WW583  (via drill 1.02 pad 1.8)
  other vias: 45.19,22.33
WW584  (via drill 1.02 pad 1.8)
  other vias: 45.19,24.87
WW585  (via drill 1.02 pad 1.8)
  other vias: 45.19,27.41
WW586  (via drill 1.02 pad 1.8)
  other vias: 45.19,29.95
WW587  (via drill 1.02 pad 1.8)
  other vias: 45.19,32.49
WW588  (via drill 1.02 pad 1.8)
  other vias: 45.19,35.03
WW589  (via drill 1.02 pad 1.8)
  other vias: 45.19,37.57
WW590  (via drill 1.02 pad 1.8)
  other vias: 45.19,40.11
WW591  (via drill 1.02 pad 1.8)
  other vias: 45.19,42.65
WW592  (via drill 1.02 pad 1.8)
  other vias: 45.19,45.19
WW593  (via drill 1.02 pad 1.8)
  other vias: 45.19,47.73
WW594  (via drill 1.02 pad 1.8)
  other vias: 45.19,50.27
WW595  (via drill 1.02 pad 1.8)
  other vias: 45.19,52.81
WW596  (via drill 1.02 pad 1.8)
  other vias: 45.19,55.35
WW597  (via drill 1.02 pad 1.8)
  other vias: 45.19,57.89
WW598  (via drill 1.02 pad 1.8)
  other vias: 45.19,60.43
WW599  (via drill 1.02 pad 1.8)
  other vias: 45.19,62.97
WW600  (via drill 1.02 pad 1.8)
  other vias: 45.19,65.51
WW601  (via drill 1.02 pad 1.8)
  other vias: 45.19,68.05
WW602  (via drill 1.02 pad 1.8)
  other vias: 45.19,70.59
WW603  (via drill 1.02 pad 1.8)
  other vias: 45.19,73.13
WW604  (via drill 1.02 pad 1.8)
  other vias: 45.19,75.67
WW605  (via drill 1.02 pad 1.8)
  other vias: 45.19,78.21
WW606  (via drill 1.02 pad 1.8)
  other vias: 45.19,80.75
WW607  (via drill 1.02 pad 1.8)
  other vias: 45.19,83.29
WW608  (via drill 1.02 pad 1.8)
  other vias: 45.19,85.83
WW609  (via drill 1.02 pad 1.8)
  other vias: 45.19,88.37
WW610  (via drill 1.02 pad 1.8)
  other vias: 45.19,90.91
WW611  (via drill 1.02 pad 1.8)
  other vias: 45.19,93.45
WW612  (via drill 1.02 pad 1.8)
  other vias: 47.73,4.55
WW613  (via drill 1.02 pad 1.8)
  other vias: 47.73,7.09
WW614  (via drill 1.02 pad 1.8)
  other vias: 47.73,9.63
WW615  (via drill 1.02 pad 1.8)
  other vias: 47.73,12.17
WW616  (via drill 1.02 pad 1.8)
  other vias: 47.73,14.71
WW617  (via drill 1.02 pad 1.8)
  other vias: 47.73,17.25
WW618  (via drill 1.02 pad 1.8)
  other vias: 47.73,19.79
WW619  (via drill 1.02 pad 1.8)
  other vias: 47.73,22.33
WW620  (via drill 1.02 pad 1.8)
  other vias: 47.73,24.87
WW621  (via drill 1.02 pad 1.8)
  other vias: 47.73,27.41
WW622  (via drill 1.02 pad 1.8)
  other vias: 47.73,29.95
WW623  (via drill 1.02 pad 1.8)
  other vias: 47.73,32.49
WW624  (via drill 1.02 pad 1.8)
  other vias: 47.73,35.03
WW625  (via drill 1.02 pad 1.8)
  other vias: 47.73,37.57
WW626  (via drill 1.02 pad 1.8)
  other vias: 47.73,40.11
WW627  (via drill 1.02 pad 1.8)
  other vias: 47.73,42.65
WW628  (via drill 1.02 pad 1.8)
  other vias: 47.73,45.19
WW629  (via drill 1.02 pad 1.8)
  other vias: 47.73,47.73
WW630  (via drill 1.02 pad 1.8)
  other vias: 47.73,50.27
WW631  (via drill 1.02 pad 1.8)
  other vias: 47.73,52.81
WW632  (via drill 1.02 pad 1.8)
  other vias: 47.73,55.35
WW633  (via drill 1.02 pad 1.8)
  other vias: 47.73,57.89
WW634  (via drill 1.02 pad 1.8)
  other vias: 47.73,60.43
WW635  (via drill 1.02 pad 1.8)
  other vias: 47.73,62.97
WW636  (via drill 1.02 pad 1.8)
  other vias: 47.73,65.51
WW637  (via drill 1.02 pad 1.8)
  other vias: 47.73,68.05
WW638  (via drill 1.02 pad 1.8)
  other vias: 47.73,70.59
WW639  (via drill 1.02 pad 1.8)
  other vias: 47.73,73.13
WW640  (via drill 1.02 pad 1.8)
  other vias: 47.73,75.67
WW641  (via drill 1.02 pad 1.8)
  other vias: 47.73,78.21
WW642  (via drill 1.02 pad 1.8)
  other vias: 47.73,80.75
WW643  (via drill 1.02 pad 1.8)
  other vias: 47.73,83.29
WW644  (via drill 1.02 pad 1.8)
  other vias: 47.73,85.83
WW645  (via drill 1.02 pad 1.8)
  other vias: 47.73,88.37
WW646  (via drill 1.02 pad 1.8)
  other vias: 47.73,90.91
WW647  (via drill 1.02 pad 1.8)
  other vias: 47.73,93.45
WW648  (via drill 1.02 pad 1.8)
  other vias: 50.27,4.55
WW649  (via drill 1.02 pad 1.8)
  other vias: 50.27,7.09
WW650  (via drill 1.02 pad 1.8)
  other vias: 50.27,9.63
WW651  (via drill 1.02 pad 1.8)
  other vias: 50.27,12.17
WW652  (via drill 1.02 pad 1.8)
  other vias: 50.27,14.71
WW653  (via drill 1.02 pad 1.8)
  other vias: 50.27,17.25
WW654  (via drill 1.02 pad 1.8)
  other vias: 50.27,19.79
WW655  (via drill 1.02 pad 1.8)
  other vias: 50.27,22.33
WW656  (via drill 1.02 pad 1.8)
  other vias: 50.27,24.87
WW657  (via drill 1.02 pad 1.8)
  other vias: 50.27,27.41
WW658  (via drill 1.02 pad 1.8)
  other vias: 50.27,29.95
WW659  (via drill 1.02 pad 1.8)
  other vias: 50.27,32.49
WW660  (via drill 1.02 pad 1.8)
  other vias: 50.27,35.03
WW661  (via drill 1.02 pad 1.8)
  other vias: 50.27,37.57
WW662  (via drill 1.02 pad 1.8)
  other vias: 50.27,40.11
WW663  (via drill 1.02 pad 1.8)
  other vias: 50.27,42.65
WW664  (via drill 1.02 pad 1.8)
  other vias: 50.27,45.19
WW665  (via drill 1.02 pad 1.8)
  other vias: 50.27,47.73
WW666  (via drill 1.02 pad 1.8)
  other vias: 50.27,50.27
WW667  (via drill 1.02 pad 1.8)
  other vias: 50.27,52.81
WW668  (via drill 1.02 pad 1.8)
  other vias: 50.27,55.35
WW669  (via drill 1.02 pad 1.8)
  other vias: 50.27,57.89
WW670  (via drill 1.02 pad 1.8)
  other vias: 50.27,60.43
WW671  (via drill 1.02 pad 1.8)
  other vias: 50.27,62.97
WW672  (via drill 1.02 pad 1.8)
  other vias: 50.27,65.51
WW673  (via drill 1.02 pad 1.8)
  other vias: 50.27,68.05
WW674  (via drill 1.02 pad 1.8)
  other vias: 50.27,70.59
WW675  (via drill 1.02 pad 1.8)
  other vias: 50.27,73.13
WW676  (via drill 1.02 pad 1.8)
  other vias: 50.27,75.67
WW677  (via drill 1.02 pad 1.8)
  other vias: 50.27,78.21
WW678  (via drill 1.02 pad 1.8)
  other vias: 50.27,80.75
WW679  (via drill 1.02 pad 1.8)
  other vias: 50.27,83.29
WW680  (via drill 1.02 pad 1.8)
  other vias: 50.27,85.83
WW681  (via drill 1.02 pad 1.8)
  other vias: 50.27,88.37
WW682  (via drill 1.02 pad 1.8)
  other vias: 50.27,90.91
WW683  (via drill 1.02 pad 1.8)
  other vias: 50.27,93.45
WW684  (via drill 1.02 pad 1.8)
  other vias: 52.81,4.55
WW685  (via drill 1.02 pad 1.8)
  other vias: 52.81,7.09
WW686  (via drill 1.02 pad 1.8)
  other vias: 52.81,9.63
WW687  (via drill 1.02 pad 1.8)
  other vias: 52.81,12.17
WW688  (via drill 1.02 pad 1.8)
  other vias: 52.81,14.71
WW689  (via drill 1.02 pad 1.8)
  other vias: 52.81,17.25
WW690  (via drill 1.02 pad 1.8)
  other vias: 52.81,19.79
WW691  (via drill 1.02 pad 1.8)
  other vias: 52.81,22.33
WW692  (via drill 1.02 pad 1.8)
  other vias: 52.81,24.87
WW693  (via drill 1.02 pad 1.8)
  other vias: 52.81,27.41
WW694  (via drill 1.02 pad 1.8)
  other vias: 52.81,29.95
WW695  (via drill 1.02 pad 1.8)
  other vias: 52.81,32.49
WW696  (via drill 1.02 pad 1.8)
  other vias: 52.81,35.03
WW697  (via drill 1.02 pad 1.8)
  other vias: 52.81,37.57
WW698  (via drill 1.02 pad 1.8)
  other vias: 52.81,40.11
WW699  (via drill 1.02 pad 1.8)
  other vias: 52.81,42.65
WW700  (via drill 1.02 pad 1.8)
  other vias: 52.81,45.19
WW701  (via drill 1.02 pad 1.8)
  other vias: 52.81,47.73
WW702  (via drill 1.02 pad 1.8)
  other vias: 52.81,50.27
WW703  (via drill 1.02 pad 1.8)
  other vias: 52.81,52.81
WW704  (via drill 1.02 pad 1.8)
  other vias: 52.81,55.35
WW705  (via drill 1.02 pad 1.8)
  other vias: 52.81,57.89
WW706  (via drill 1.02 pad 1.8)
  other vias: 52.81,60.43
WW707  (via drill 1.02 pad 1.8)
  other vias: 52.81,62.97
WW708  (via drill 1.02 pad 1.8)
  other vias: 52.81,65.51
WW709  (via drill 1.02 pad 1.8)
  other vias: 52.81,68.05
WW710  (via drill 1.02 pad 1.8)
  other vias: 52.81,70.59
WW711  (via drill 1.02 pad 1.8)
  other vias: 52.81,73.13
WW712  (via drill 1.02 pad 1.8)
  other vias: 52.81,75.67
WW713  (via drill 1.02 pad 1.8)
  other vias: 52.81,78.21
WW714  (via drill 1.02 pad 1.8)
  other vias: 52.81,80.75
WW715  (via drill 1.02 pad 1.8)
  other vias: 52.81,83.29
WW716  (via drill 1.02 pad 1.8)
  other vias: 52.81,85.83
WW717  (via drill 1.02 pad 1.8)
  other vias: 52.81,88.37
WW718  (via drill 1.02 pad 1.8)
  other vias: 52.81,90.91
WW719  (via drill 1.02 pad 1.8)
  other vias: 52.81,93.45
WW720  (via drill 1.02 pad 1.8)
  other vias: 55.35,4.55
WW721  (via drill 1.02 pad 1.8)
  other vias: 55.35,7.09
WW722  (via drill 1.02 pad 1.8)
  other vias: 55.35,9.63
WW723  (via drill 1.02 pad 1.8)
  other vias: 55.35,12.17
WW724  (via drill 1.02 pad 1.8)
  other vias: 55.35,14.71
WW725  (via drill 1.02 pad 1.8)
  other vias: 55.35,17.25
WW726  (via drill 1.02 pad 1.8)
  other vias: 55.35,19.79
WW727  (via drill 1.02 pad 1.8)
  other vias: 55.35,22.33
WW728  (via drill 1.02 pad 1.8)
  other vias: 55.35,24.87
WW729  (via drill 1.02 pad 1.8)
  other vias: 55.35,27.41
WW730  (via drill 1.02 pad 1.8)
  other vias: 55.35,29.95
WW731  (via drill 1.02 pad 1.8)
  other vias: 55.35,32.49
WW732  (via drill 1.02 pad 1.8)
  other vias: 55.35,35.03
WW733  (via drill 1.02 pad 1.8)
  other vias: 55.35,37.57
WW734  (via drill 1.02 pad 1.8)
  other vias: 55.35,40.11
WW735  (via drill 1.02 pad 1.8)
  other vias: 55.35,42.65
WW736  (via drill 1.02 pad 1.8)
  other vias: 55.35,45.19
WW737  (via drill 1.02 pad 1.8)
  other vias: 55.35,47.73
WW738  (via drill 1.02 pad 1.8)
  other vias: 55.35,50.27
WW739  (via drill 1.02 pad 1.8)
  other vias: 55.35,52.81
WW740  (via drill 1.02 pad 1.8)
  other vias: 55.35,55.35
WW741  (via drill 1.02 pad 1.8)
  other vias: 55.35,57.89
WW742  (via drill 1.02 pad 1.8)
  other vias: 55.35,60.43
WW743  (via drill 1.02 pad 1.8)
  other vias: 55.35,62.97
WW744  (via drill 1.02 pad 1.8)
  other vias: 55.35,65.51
WW745  (via drill 1.02 pad 1.8)
  other vias: 55.35,68.05
WW746  (via drill 1.02 pad 1.8)
  other vias: 55.35,70.59
WW747  (via drill 1.02 pad 1.8)
  other vias: 55.35,73.13
WW748  (via drill 1.02 pad 1.8)
  other vias: 55.35,75.67
WW749  (via drill 1.02 pad 1.8)
  other vias: 55.35,78.21
WW750  (via drill 1.02 pad 1.8)
  other vias: 55.35,80.75
WW751  (via drill 1.02 pad 1.8)
  other vias: 55.35,83.29
WW752  (via drill 1.02 pad 1.8)
  other vias: 55.35,85.83
WW753  (via drill 1.02 pad 1.8)
  other vias: 55.35,88.37
WW754  (via drill 1.02 pad 1.8)
  other vias: 55.35,90.91
WW755  (via drill 1.02 pad 1.8)
  other vias: 55.35,93.45
WW756  (via drill 1.02 pad 1.8)
  other vias: 57.89,4.55
WW757  (via drill 1.02 pad 1.8)
  other vias: 57.89,7.09
WW758  (via drill 1.02 pad 1.8)
  other vias: 57.89,9.63
WW759  (via drill 1.02 pad 1.8)
  other vias: 57.89,12.17
WW760  (via drill 1.02 pad 1.8)
  other vias: 57.89,14.71
WW761  (via drill 1.02 pad 1.8)
  other vias: 57.89,17.25
WW762  (via drill 1.02 pad 1.8)
  other vias: 57.89,19.79
WW763  (via drill 1.02 pad 1.8)
  other vias: 57.89,22.33
WW764  (via drill 1.02 pad 1.8)
  other vias: 57.89,24.87
WW765  (via drill 1.02 pad 1.8)
  other vias: 57.89,27.41
WW766  (via drill 1.02 pad 1.8)
  other vias: 57.89,29.95
WW767  (via drill 1.02 pad 1.8)
  other vias: 57.89,32.49
WW768  (via drill 1.02 pad 1.8)
  other vias: 57.89,35.03
WW769  (via drill 1.02 pad 1.8)
  other vias: 57.89,37.57
WW770  (via drill 1.02 pad 1.8)
  other vias: 57.89,40.11
WW771  (via drill 1.02 pad 1.8)
  other vias: 57.89,42.65
WW772  (via drill 1.02 pad 1.8)
  other vias: 57.89,45.19
WW773  (via drill 1.02 pad 1.8)
  other vias: 57.89,47.73
WW774  (via drill 1.02 pad 1.8)
  other vias: 57.89,50.27
WW775  (via drill 1.02 pad 1.8)
  other vias: 57.89,52.81
WW776  (via drill 1.02 pad 1.8)
  other vias: 57.89,55.35
WW777  (via drill 1.02 pad 1.8)
  other vias: 57.89,57.89
WW778  (via drill 1.02 pad 1.8)
  other vias: 57.89,60.43
WW779  (via drill 1.02 pad 1.8)
  other vias: 57.89,62.97
WW780  (via drill 1.02 pad 1.8)
  other vias: 57.89,65.51
WW781  (via drill 1.02 pad 1.8)
  other vias: 57.89,68.05
WW782  (via drill 1.02 pad 1.8)
  other vias: 57.89,70.59
WW783  (via drill 1.02 pad 1.8)
  other vias: 57.89,73.13
WW784  (via drill 1.02 pad 1.8)
  other vias: 57.89,75.67
WW785  (via drill 1.02 pad 1.8)
  other vias: 57.89,78.21
WW786  (via drill 1.02 pad 1.8)
  other vias: 57.89,80.75
WW787  (via drill 1.02 pad 1.8)
  other vias: 57.89,83.29
WW788  (via drill 1.02 pad 1.8)
  other vias: 57.89,85.83
WW789  (via drill 1.02 pad 1.8)
  other vias: 57.89,88.37
WW790  (via drill 1.02 pad 1.8)
  other vias: 57.89,90.91
WW791  (via drill 1.02 pad 1.8)
  other vias: 57.89,93.45
WW792  (via drill 1.02 pad 1.8)
  other vias: 60.43,4.55
WW793  (via drill 1.02 pad 1.8)
  other vias: 60.43,7.09
WW794  (via drill 1.02 pad 1.8)
  other vias: 60.43,9.63
WW795  (via drill 1.02 pad 1.8)
  other vias: 60.43,12.17
WW796  (via drill 1.02 pad 1.8)
  other vias: 60.43,14.71
WW797  (via drill 1.02 pad 1.8)
  other vias: 60.43,17.25
WW798  (via drill 1.02 pad 1.8)
  other vias: 60.43,19.79
WW799  (via drill 1.02 pad 1.8)
  other vias: 60.43,22.33
WW800  (via drill 1.02 pad 1.8)
  other vias: 60.43,24.87
WW801  (via drill 1.02 pad 1.8)
  other vias: 60.43,27.41
WW802  (via drill 1.02 pad 1.8)
  other vias: 60.43,29.95
WW803  (via drill 1.02 pad 1.8)
  other vias: 60.43,32.49
WW804  (via drill 1.02 pad 1.8)
  other vias: 60.43,35.03
WW805  (via drill 1.02 pad 1.8)
  other vias: 60.43,37.57
WW806  (via drill 1.02 pad 1.8)
  other vias: 60.43,40.11
WW807  (via drill 1.02 pad 1.8)
  other vias: 60.43,42.65
WW808  (via drill 1.02 pad 1.8)
  other vias: 60.43,45.19
WW809  (via drill 1.02 pad 1.8)
  other vias: 60.43,47.73
WW810  (via drill 1.02 pad 1.8)
  other vias: 60.43,50.27
WW811  (via drill 1.02 pad 1.8)
  other vias: 60.43,52.81
WW812  (via drill 1.02 pad 1.8)
  other vias: 60.43,55.35
WW813  (via drill 1.02 pad 1.8)
  other vias: 60.43,57.89
WW814  (via drill 1.02 pad 1.8)
  other vias: 60.43,60.43
WW815  (via drill 1.02 pad 1.8)
  other vias: 60.43,62.97
WW816  (via drill 1.02 pad 1.8)
  other vias: 60.43,65.51
WW817  (via drill 1.02 pad 1.8)
  other vias: 60.43,68.05
WW818  (via drill 1.02 pad 1.8)
  other vias: 60.43,70.59
WW819  (via drill 1.02 pad 1.8)
  other vias: 60.43,73.13
WW820  (via drill 1.02 pad 1.8)
  other vias: 60.43,75.67
WW821  (via drill 1.02 pad 1.8)
  other vias: 60.43,78.21
WW822  (via drill 1.02 pad 1.8)
  other vias: 60.43,80.75
WW823  (via drill 1.02 pad 1.8)
  other vias: 60.43,83.29
WW824  (via drill 1.02 pad 1.8)
  other vias: 60.43,85.83
WW825  (via drill 1.02 pad 1.8)
  other vias: 60.43,88.37
WW826  (via drill 1.02 pad 1.8)
  other vias: 60.43,90.91
WW827  (via drill 1.02 pad 1.8)
  other vias: 60.43,93.45
WW828  (via drill 1.02 pad 1.8)
  other vias: 62.97,4.55
WW829  (via drill 1.02 pad 1.8)
  other vias: 62.97,7.09
WW830  (via drill 1.02 pad 1.8)
  other vias: 62.97,9.63
WW831  (via drill 1.02 pad 1.8)
  other vias: 62.97,12.17
WW832  (via drill 1.02 pad 1.8)
  other vias: 62.97,14.71
WW833  (via drill 1.02 pad 1.8)
  other vias: 62.97,17.25
WW834  (via drill 1.02 pad 1.8)
  other vias: 62.97,19.79
WW835  (via drill 1.02 pad 1.8)
  other vias: 62.97,22.33
WW836  (via drill 1.02 pad 1.8)
  other vias: 62.97,24.87
WW837  (via drill 1.02 pad 1.8)
  other vias: 62.97,27.41
WW838  (via drill 1.02 pad 1.8)
  other vias: 62.97,29.95
WW839  (via drill 1.02 pad 1.8)
  other vias: 62.97,32.49
WW840  (via drill 1.02 pad 1.8)
  other vias: 62.97,35.03
WW841  (via drill 1.02 pad 1.8)
  other vias: 62.97,37.57
WW842  (via drill 1.02 pad 1.8)
  other vias: 62.97,40.11
WW843  (via drill 1.02 pad 1.8)
  other vias: 62.97,42.65
WW844  (via drill 1.02 pad 1.8)
  other vias: 62.97,45.19
WW845  (via drill 1.02 pad 1.8)
  other vias: 62.97,47.73
WW846  (via drill 1.02 pad 1.8)
  other vias: 62.97,50.27
WW847  (via drill 1.02 pad 1.8)
  other vias: 62.97,52.81
WW848  (via drill 1.02 pad 1.8)
  other vias: 62.97,55.35
WW849  (via drill 1.02 pad 1.8)
  other vias: 62.97,57.89
WW850  (via drill 1.02 pad 1.8)
  other vias: 62.97,60.43
WW851  (via drill 1.02 pad 1.8)
  other vias: 62.97,62.97
WW852  (via drill 1.02 pad 1.8)